# EAGLE board CT_schematic (EAGLE 7.6.0)

Size 100 x 80 mm. Coordinates in mm from the lower left corner, seen from the top.
Outline: 0,0 100,0 100,80 0,80 0,0
Copper layers (1*16): Top 0.035mm / dielectric 1.5mm / Bottom 0.035mm
Design rules "default": minimum track width 10mil, minimum drill 24mil, track to track 8mil, track to pad 8mil, pad to pad 8mil, via to via 8mil, smd to smd 8mil, copper to edge 40mil, drill to drill 8mil, minimum pad ring 10mil, minimum via ring 8mil, stop-mask expansion 4mil, vias tented up to drill 0mil, thermal gap 10mil

## Footprints (pad centres in the part's own frame; a part is rotated, then mirrored left to right if it is on the bottom)
C0603 = smd 0.8 x 0.8: 1 -0.762,0; 2 0.762,0
C0402 = smd 0.5 x 0.5: 1 -0.508,0; 2 0.508,0
C0805 = smd 1.2 x 1.3: 1 -1.016,0; 2 1.016,0
C1206 = smd 1.3 x 1.6: 1 -1.524,0; 2 1.524,0
C1210 = smd 1.2 x 2.5: 1 -1.524,0; 2 1.524,0
EXV-9H = smd 3.505 x 1.676: 1 -2.857,0; 2 2.857,0
L0603 = smd 0.8 x 0.8: 1 -0.762,0; 2 0.762,0
PJ-037B_PACKAGE = drill 3.7 square: 1 12,0 | drill 3.2 square: 2 6,0
R0603 = smd 0.8 x 0.8: 1 -0.762,0; 2 0.762,0
UFQFPN48 = smd 0.559 x 0.305: 1 -3.375,2.751; 2 -3.375,2.251; 3 -3.375,1.75; 4 -3.375,1.25; 5 -3.375,0.75; 6 -3.375,0.25; 7 -3.375,-0.25; 8 -3.375,-0.75; 9 -3.375,-1.25; 10 -3.375,-1.75; 11 -3.375,-2.251; 12 -3.375,-2.751; 25 3.375,-2.751; 26 3.375,-2.251; 27 3.375,-1.75; 28 3.375,-1.25; 29 3.375,-0.75; 30 3.375,-0.25; 31 3.375,0.25; 32 3.375,0.75; 33 3.375,1.25; 34 3.375,1.75; 35 3.375,2.251; 36 3.375,2.751 | smd 0.305 x 0.559: 13 -2.751,-3.375; 14 -2.251,-3.375; 15 -1.75,-3.375; 16 -1.25,-3.375; 17 -0.75,-3.375; 18 -0.25,-3.375; 19 0.25,-3.375; 20 0.75,-3.375; 21 1.25,-3.375; 22 1.75,-3.375; 23 2.251,-3.375; 24 2.751,-3.375; 37 2.751,3.375; 38 2.251,3.375; 39 1.75,3.375; 40 1.25,3.375; 41 0.75,3.375; 42 0.25,3.375; 43 -0.25,3.375; 44 -0.75,3.375; 45 -1.25,3.375; 46 -1.75,3.375; 47 -2.251,3.375; 48 -2.751,3.375 | smd 5.588 x 5.588: 49 0,0
SAMTEC_FTSH-105-01-L-DV-K = smd 0.762 x 2.794: 1 -2.54,-2.032; 2 -2.54,2.032; 3 -1.27,-2.032; 4 -1.27,2.032; 5 0,-2.032; 6 0,2.032; 7 1.27,-2.032; 8 1.27,2.032; 9 2.54,-2.032; 10 2.54,2.032
XB24CZ7UIS-004 = smd 2.84 x 1.52: 1 -10,6; 2 -10,4; 3 -10,2; 4 -10,0; 5 -10,-2; 6 -10,-4; 7 -10,-6; 8 -10,-8; 9 -10,-10; 10 -10,-12; 11 -10,-14; 12 -10,-16; 13 -10,-18; 21 10,-18; 22 10,-16; 23 10,-14; 24 10,-12; 25 10,-10; 26 10,-8; 27 10,-6; 28 10,-4; 29 10,-2; 30 10,0; 31 10,2; 32 10,4; 33 10,6; 34 10,8; 35 10,10; 36 10,12; 37 10,14 | smd 1.52 x 2.84: 14 -6,-19.68; 15 -4,-19.68; 16 -2,-19.68; 17 0,-19.68; 18 2,-19.68; 19 4,-19.68; 20 6,-19.68
ASEK = smd 1.4 x 1: 1 -1.1,-0.8; 2 1.1,-0.8; 3 1.1,0.8; 4 -1.1,0.8
ASFL1 = smd 1.7 x 1.5: 1 -1.27,-1.1; 2 1.27,-1.1; 3 1.27,1.1; 4 -1.27,1.1
WSON-8 = smd 0.3 x 0.6: 1 -0.75,0; 2 0.05,0; 3 0.85,0; 4 1.65,0; 5 1.65,3.8; 6 0.85,3.8; 7 0.05,3.8; 8 -0.75,3.8 | smd 3 x 2.6: PAD 0.45,1.9
SON-6 = smd 0.55 x 0.3: 1 -0.355,0.5 | smd 0.52 x 0.3: 2 -0.37,0; 3 -0.37,-0.5; 4 0.37,-0.5; 5 0.37,0; 6 0.37,0.5
SW_4-1437565-2 = smd 1.4 x 2.1: 1 -2.23,4.55; 2 -2.23,-4.55; 3 2.23,4.55; 4 2.23,-4.55
LGM67K-G1J2-24-Z = smd 0.8 x 1.4: A -2,0; C 0,0
NC7SZ125M5X = smd 1.3 x 0.7: 1 -1.3,0.95; 2 -1.3,0; 3 -1.3,-0.95; 4 1.3,-0.95; 5 1.3,0.95

## Placement (x,y rotation side)
C1  1e-06  [C0603]  -15.24,78.74 0 top  (outside the outline)
C2  1e-07  [C0603]  -19.05,78.74 0 top  (outside the outline)
C3  1e-07  [C0603]  -22.86,78.74 0 top  (outside the outline)
C4  1e-07  [C0603]  -26.67,78.74 0 top  (outside the outline)
C5  4.7e-06  [C0603]  -64.77,73.66 0 top  (outside the outline)
C6  1e-07  [C0603]  -30.48,78.74 0 top  (outside the outline)
C7  1e-08  [C0603]  -34.29,78.74 0 top  (outside the outline)
C8  1e-06  [C0603]  -38.1,78.74 0 top  (outside the outline)
C9  1e-07  [C0402]  -24.13,83.82 0 top  (outside the outline)
C10  1e-05  [C0805]  -69.85,66.04 0 top  (outside the outline)
C11  1e-07  [C0402]  -27.94,83.82 0 top  (outside the outline)
C12  4.7e-11  [C0402]  -20.32,83.82 0 top  (outside the outline)
C13  8.2e-12  [C0603]  -68.58,73.66 0 top  (outside the outline)
C14  1e-08  [C0402]  -31.75,83.82 0 top  (outside the outline)
C15  1e-08  [C0402]  -35.56,83.82 0 top  (outside the outline)
C16  1e-08  [C0402]  -39.37,83.82 0 top  (outside the outline)
C17  1e-05  [C1206]  -45.72,66.04 0 top  (outside the outline)
C18  1e-05  [C1210]  -39.37,66.04 0 top  (outside the outline)
C19  1e-07  [C0402]  -43.18,83.82 0 top  (outside the outline)
C20  0.0001  [EXV-9H]  -66.04,58.42 0 top  (outside the outline)
C21  0.0001  [EXV-9H]  -17.78,67.31 0 top  (outside the outline)
C22  1e-08  [C0402]  -46.99,83.82 0 top  (outside the outline)
C23  1e-08  [C0402]  -50.8,83.82 0 top  (outside the outline)
C24  1e-08  [C0402]  -54.61,83.82 0 top  (outside the outline)
F1  240.0  [L0603]  -41.91,78.74 0 top  (outside the outline)
J1  PJ-037B  [PJ-037B_PACKAGE]  -27.94,46.99 0 top  (outside the outline)
R1  10000.0  [R0603]  -30.48,73.66 0 top  (outside the outline)
R2  1000.0  [R0603]  -45.72,78.74 0 top  (outside the outline)
R3  1600.5  [R0603]  -49.53,78.74 0 top  (outside the outline)
R4  4700.0  [R0603]  -53.34,78.74 0 top  (outside the outline)
R5  4700.0  [R0603]  -57.15,78.74 0 top  (outside the outline)
R6  10000.0  [R0603]  -35.56,73.66 0 top  (outside the outline)
R7  10000.0  [R0603]  -40.64,73.66 0 top  (outside the outline)
R8  10000.0  [R0603]  -45.72,73.66 0 top  (outside the outline)
R9  10000.0  [R0603]  -50.8,73.66 0 top  (outside the outline)
R10  5.0  [R0603]  -60.96,78.74 0 top  (outside the outline)
R11  100000.0  [R0603]  -15.24,73.66 0 top  (outside the outline)
R12  2231.0  [R0603]  -64.77,78.74 0 top  (outside the outline)
R13  1000.0  [R0603]  -68.58,78.74 0 top  (outside the outline)
R14  10000.0  [R0603]  -55.88,73.66 0 top  (outside the outline)
R15  10000.0  [R0603]  -60.96,73.66 0 top  (outside the outline)
R16  9100.0  [R0603]  -15.24,83.82 0 top  (outside the outline)
R17  680000.0  [R0603]  -20.32,73.66 0 top  (outside the outline)
R18  120000.0  [R0603]  -25.4,73.66 0 top  (outside the outline)
U1  stm32f051c8u7  [UFQFPN48]  -17.78,58.42 0 top  (outside the outline)
U2  FTSH-105-01-L-DV-K  [SAMTEC_FTSH-105-01-L-DV-K]  -62.23,7.62 0 top  (outside the outline)
U3  XB24CZ7UIS-004  [XB24CZ7UIS-004]  -25.4,21.59 0 top  (outside the outline)
U4  ASEK-32.768KHz-ECST  [ASEK]  -57.15,58.42 0 top  (outside the outline)
U5  ASFL1-25MHZ-NCS  [ASFL1]  -36.83,58.42 0 top  (outside the outline)
U6  LP3878SDX-ADJ/NOPB  [WSON-8]  -66.04,41.91 0 top  (outside the outline)
U7  TPS3895ADRYR  [SON-6]  -57.15,82.55 0 top  (outside the outline)
U8  4-1437565-2  [SW_4-1437565-2]  -44.45,45.72 0 top  (outside the outline)
U9  Q65110A2395  [LGM67K-G1J2-24-Z]  -27.94,66.04 0 top  (outside the outline)
U10  nc7sz125m5x  [NC7SZ125M5X]  -50.8,64.77 0 top  (outside the outline)
U11  nc7sz125m5x  [NC7SZ125M5X]  -57.15,64.77 0 top  (outside the outline)
U12  nc7sz125m5x  [NC7SZ125M5X]  -63.5,64.77 0 top  (outside the outline)

## Library data of the parts
C1-C24 F1 J1 R1-R18 U1-U12 = circuit_tree

## Nets
CLK_U1_3: U1.3 U4.3
CLK_U1_5: U1.5 U5.3
GND: C1.2 C2.2 C3.2 C4.2 C5.2 C6.2 C7.2 C8.2 C9.2 C10.2 C11.2 C12.2 C13.2 C14.2 C15.2 C16.2 C17.2 C18.2 C19.2 C20.2 C21.2 C22.2 C23.2 C24.2 J1.2 R2.2 R6.2 R10.2 R13.2 R16.2 R18.2 U1.8 U1.23 U1.47 U1.49 U2.3 U2.5 U3.1 U3.11 U3.13 U3.22 U3.35 U4.2 U5.2 U6.3 U6.PAD U7.2 U9.C U10.2 U10.3 U11.1 U11.3 U12.1 U12.3
NET_U1_7: R5.1 U1.7 U12.4
NET_U1_9: C7.1 C8.1 F1.1 U1.9
NET_U1_44: R6.1 U1.44
NET_U1_45: R3.1 U1.45 U9.A
NET_U1_46: R1.1 U1.46 U8.3 U8.4
NET_U2_9: R10.1 U2.9
NET_U3_6: R4.1 U3.6 U11.4
NET_U6_1: C16.1 U6.1
NET_U6_6: R12.2 R13.1 U6.6
NET_U6_8: R11.1 U6.8
NET_U7_1: R15.1 R16.1 U7.1
NET_U7_3: R17.2 R18.1 U7.3
NET_U7_4: R14.1 U7.4 U10.4 U11.2 U12.2
NET_U8_1: R2.1 U8.1 U8.2
PROC_SPI1_MISO: U1.16 U3.17
PROC_SPI1_MOSI: U1.17 U3.16
PROC_SPI1_NSS: U1.14 U3.15
PROC_SPI1_SCK: U1.15 U3.14
PROC_SYS_SWCLK: R8.1 U1.37 U2.4
PROC_SYS_SWDIO: R9.1 U1.34 U2.2
RST_OUT_U2_JTAG_RST_B: R7.1 U2.10 U10.1
VCC_S1_10V0: C17.1 C20.1 C21.1 J1.1 R11.2 U6.4
VCC_TIER1_3V3: C1.1 C2.1 C3.1 C4.1 C5.1 C6.1 C9.1 C10.1 C11.1 C12.1 C13.1 C14.1 C15.1 C18.1 C19.1 C22.1 C23.1 C24.1 F1.2 R1.2 R3.2 R4.2 R5.2 R7.2 R8.2 R9.2 R12.1 R14.2 R15.2 R17.1 U1.1 U1.24 U1.48 U2.1 U3.2 U3.27 U4.4 U5.4 U6.5 U7.6 U10.5 U11.5 U12.5

## Tracks (layer width: path | path; a pad name or v marks a point on that pad's centre or on a via)
CLK_U1_3  (1 unrouted)
CLK_U1_5  (1 unrouted)
GND  (53 unrouted)
NET_U1_7  (2 unrouted)
NET_U1_9  (3 unrouted)
NET_U1_44  (1 unrouted)
NET_U1_45  (2 unrouted)
NET_U1_46  (3 unrouted)
NET_U2_9  (1 unrouted)
NET_U3_6  (2 unrouted)
NET_U6_1  (1 unrouted)
NET_U6_6  (2 unrouted)
NET_U6_8  (1 unrouted)
NET_U7_1  (2 unrouted)
NET_U7_3  (2 unrouted)
NET_U7_4  (4 unrouted)
NET_U8_1  (2 unrouted)
PROC_SPI1_MISO  (1 unrouted)
PROC_SPI1_MOSI  (1 unrouted)
PROC_SPI1_NSS  (1 unrouted)
PROC_SPI1_SCK  (1 unrouted)
PROC_SYS_SWCLK  (2 unrouted)
PROC_SYS_SWDIO  (2 unrouted)
RST_OUT_U2_JTAG_RST_B  (2 unrouted)
VCC_S1_10V0  (5 unrouted)
VCC_TIER1_3V3  (42 unrouted)